# Altium PCB PCB1.2.PcbDoc (part 2 of 2)
Units mil, origin at the board's own origin, x right, y up, seen from the top; angles counter-clockwise.
Board outline 1692.91 x 1692.91 mil, 4 copper layers (Top Layer, Mid-Layer 1, Mid-Layer 2, Bottom Layer); 152 components, 107 nets, 552 pads, 236 vias.
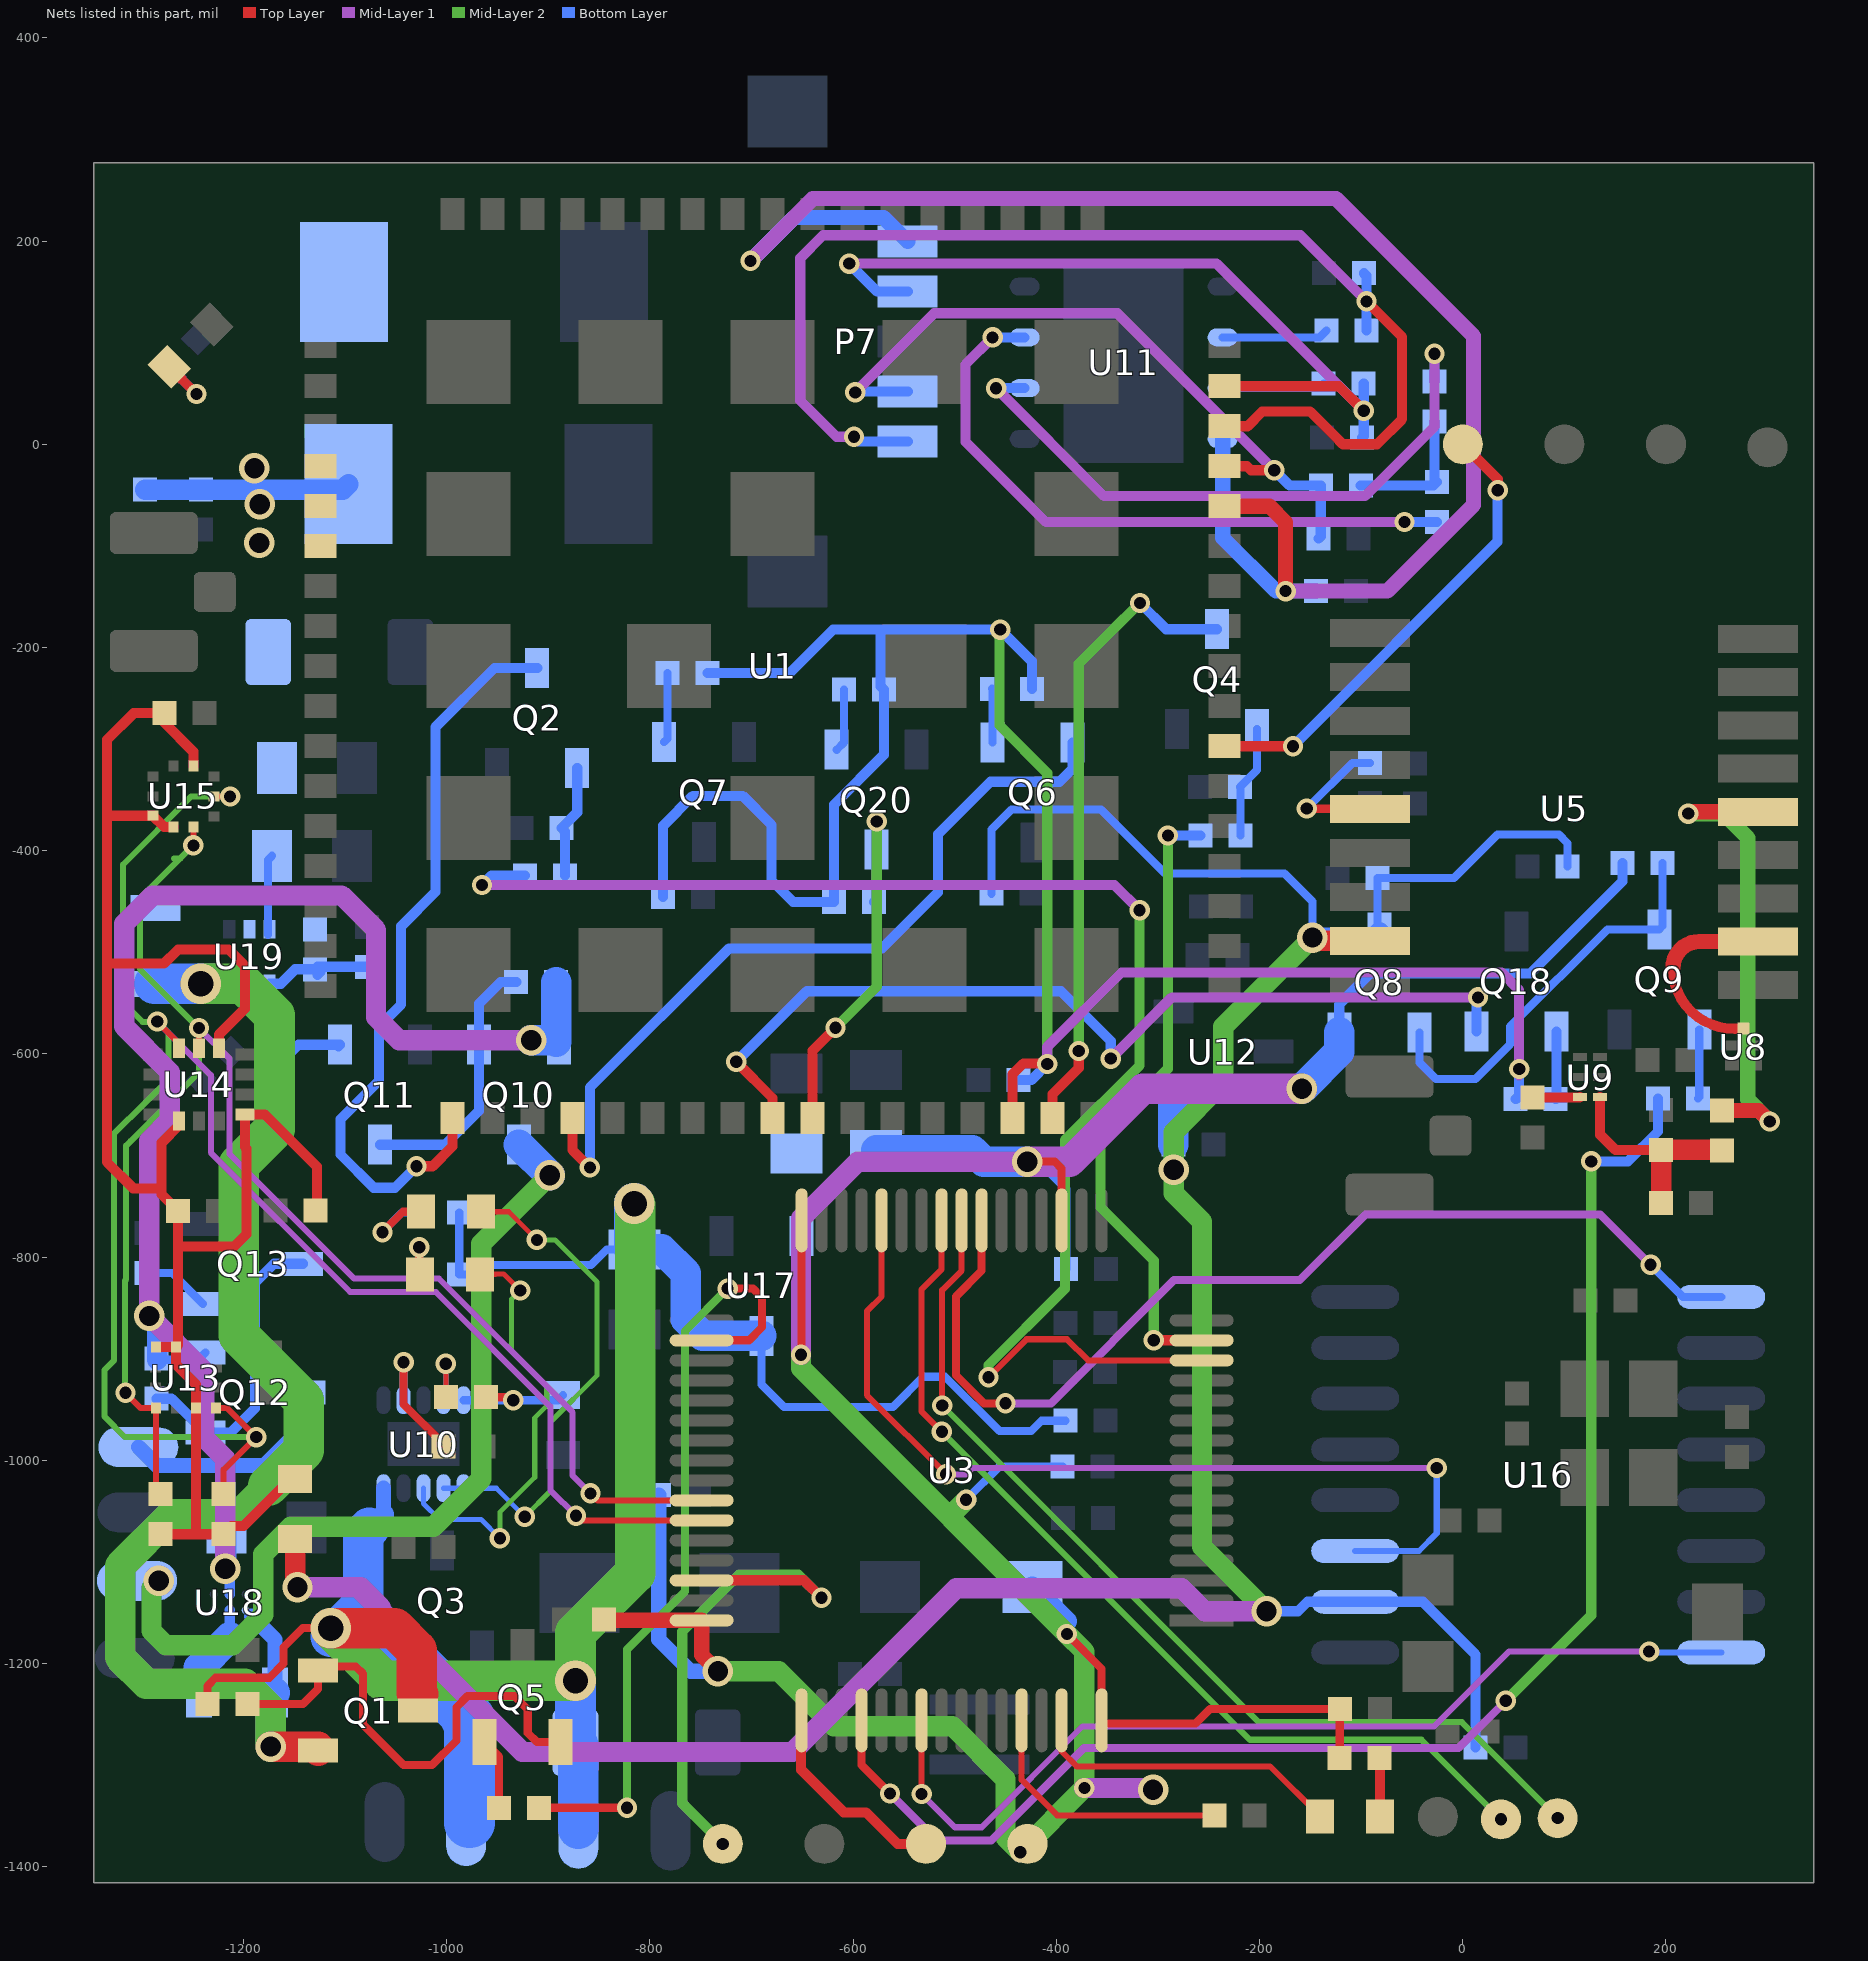
[diagram p4: the nets of this part, all layers, seen from the top]

## Via types
v1: diameter 20, hole 12, Top Layer to Bottom Layer, tented both sides, 204 vias
v2: diameter 30, hole 20, Top Layer to Bottom Layer, tented both sides, 25 vias
v3: diameter 40, hole 25, Top Layer to Bottom Layer, tented both sides, 7 vias

## Nets (pads, with @x,y where several pads share a name; then routed paths per layer and width w, separated by ;. In a path a pad name is that pad's centre, name@x,y a point inside that pad or via, vN(x,y) a via of type N, cw(c..) or ccw(c..) an arc to the next point about the centre after c; other vN are vias at no path point) (continued)
NetL2_1: L2.1 U5.14 | length 477.7
  Top Layer w15: v1(221.99,-363.51) 223.77,-361.74 U5.14@290.75,-361.74 ; L2.1@255.01,-655.65 291.37,-655.65 v1(302.22,-666.51)
  Mid-Layer 2 w15: v1(221.99,-363.51) 256.52,-363.51 280.57,-387.56 280.57,-644.85 v1(302.22,-666.51)
NetL3_1: L3.1 U9.3 | length 47.4
  Top Layer w10: L3.1@68.41,-643.04 114.94,-643.04 U9.3@115.52,-642.46
NetL5_2: L5.2 U18.B1 | length 93.6
  Bottom Layer w10: L5.2@-1243.95,-1228.55 L5.2@-1243.95,-1204.36 ; -1213.65,-1174.07 U18.B1@-1213.65,-1147.51
  Bottom Layer w30: L5.2@-1243.95,-1204.36 -1213.65,-1174.07
NetL6_1: L6.1 U19.5
NetLED1_2: LED1.2 R9.1 | length 75.7
  Top Layer w10: LED1.2@-1273.07,76.23 v1(-1246.31,49.48)
  Bottom Layer w10: R9.1@-1273.07,76.23 v1(-1246.31,49.48)
NetLED2_1: LED2.1 R29.2 | length 90.5
  Top Layer w8: v1(-1063.27,-775.47) -1043.15,-755.35 LED2.1@-1025.27,-755.35
  Bottom Layer w8: v1(-1063.27,-775.47) -1043.94,-756.15 R29.2@-1027.13,-756.15
NetLED2_2: LED2.2 U10.6 U10.7 | length 510.4
  Top Layer w5: LED2.2@-966.22,-755.35 -938.97,-755.35 ; -928.03,-766.29 -938.97,-755.35 ; v1(-911.3,-783.01) -938.97,-755.35
  Mid-Layer 2 w5: v1(-923.16,-1055.5) -897.96,-1030.31 -897.96,-962.35 -851.98,-916.36 -851.98,-824.5 -893.46,-783.01 v1(-911.3,-783.01)
  Bottom Layer w5: U10.7@-1003.11,-1027.46 U10.6@-983.42,-1027.46 -951.2,-1027.46 v1(-923.16,-1055.5)
NetLED4_1: LED4.1 R12.2 | length 54.1
  Top Layer w8: v1(-1027.13,-790.29) -1027.13,-816.17 LED4.1@-1026.16,-817.15
  Bottom Layer w8: R12.2@-1027.13,-817.15 v1(-1027.13,-790.29)
NetLED4_2: LED4.2 U10.8 | length 446.7
  Top Layer w5: -952.19,-817.15 LED4.2@-967.11,-817.15 -966.41,-816.45 -944.12,-816.45 v1(-927.64,-832.93)
  Mid-Layer 2 w5: v1(-947.74,-1076.74) -947.74,-1051.08 -913.39,-1016.72 -913.39,-958.21 -901.58,-946.4 -901.58,-927.14 -936.22,-892.51 -936.22,-841.51 v1(-927.64,-832.93)
  Bottom Layer w5: U10.8@-1022.79,-1027.46 -1022.79,-1042.67 -1007.37,-1058.09 -966.39,-1058.09 v1(-947.74,-1076.74)
NetLED5_1: LED5.1 R65.1 | length 57.6
  Top Layer w10: R65.1@-81.75,-1293.1 -81.42,-1293.43 LED5.1@-81.42,-1350.52
NetLED5_2: LED5.2 U3.62 | length 311.5
  Top Layer w6: U3.62@-394.8,-1255.91 -394.8,-1286.61 -380.14,-1301.27 -204.48,-1301.27 -189.72,-1301.27 LED5.2@-140.47,-1350.52
NetQ1_1: Q1.1 Q5.2 R8.2 | length 485.5
  Top Layer w8: R8.2@-1196.21,-1240.02 -1141.58,-1240.02 -1126.58,-1225.02 Q1.1@-1126.58,-1207.02 -1126.58,-1203.02 -1089.58,-1203.02 -1082.58,-1210.02 -1082.58,-1260.02 -1042.58,-1300.02 -1014.58,-1300.02 -990.58,-1276.02 -990.58,-1243.02 -979.58,-1232.02 -933.47,-1232.02 -920.26,-1245.24 -920.26,-1268.35 -911.29,-1277.31 Q5.2@-888.18,-1277.31
NetQ2_1: Q2.1 R10.1 R11.1 | length 113.5
  Bottom Layer w10: R10.1@-883.74,-424.24 -883.74,-381.01 R11.1@-887.09,-377.67 -871.62,-362.19 Q2.1@-871.62,-318.53
NetQ4_1: Q4.1 R4.1 R16.1 | length 111.7
  Bottom Layer w8: R16.1@-218.7,-384.95 -218.7,-337.74 R4.1@-219.17,-337.27 -202.4,-320.5 Q4.1@-202.4,-280.38
NetQ5_1: Q5.1 R17.1 | length 70.7
  Top Layer w8: Q5.1@-962.99,-1277.31 -948.58,-1291.71 R17.1@-948.58,-1342.02
NetQ6_1: Q6.1 R28.1 | length 53.1
  Bottom Layer w8: R28.1@-463.46,-240.63 -462.79,-241.3 Q6.1@-462.79,-293.42
NetQ7_1: Q7.1 R31.1 | length 69.5
  Bottom Layer w8: Q7.1@-786.19,-293.16 -782.85,-289.82 R31.1@-782.85,-225.07
NetQ8_1: Q8.1 Q9.3 R33.2 | length 405.9
  Bottom Layer w8: Q8.1@-42.76,-578.76 -42.76,-608.27 -26.22,-624.81 12.37,-624.81 46.52,-590.65 46.52,-573.13 142.28,-477.38 Q9.3@193.4,-477.38 ; Q9.3@196.61,-474.17 R33.2@196.61,-412.12
NetQ9_1: Q9.1 R34.1 | length 68.5
  Bottom Layer w8: R34.1@231.51,-643.8 232.77,-642.54 Q9.1@232.77,-575.8
NetQ10_1: Q10.1 Q11.3 R36.2 | length 262.2
  Bottom Layer w10: Q11.3@-1065.84,-689.38 -1001.73,-689.38 -968.32,-655.97 Q10.1@-968.32,-590.95 -968.32,-550.57 -947.13,-529.38 R36.2@-931.67,-529.38
NetQ11_1: Q11.1 R37.1 | length 95.6
  Bottom Layer w10: R37.1@-1165.03,-633.64 -1165.03,-610.03 -1145.95,-590.95 Q11.1@-1108.22,-590.95 ; Q11.1@-1108.22,-590.95 Q11.1@-1105.21,-590.95 -1106.72,-592.46 Q11.1@-1108.22,-590.95
NetQ12_1: Q12.1 Q13.3 R50.2 | length 299.2
  Bottom Layer w10: R50.2@-1285.84,-939.37 -1270.8,-939.37 Q12.1@-1237.57,-972.6 -1212.68,-972.6 -1188.8,-948.72 -1188.8,-825.39 -1170.01,-806.6 Q13.3@-1141.46,-806.6
NetQ13_1: Q13.1 R51.1 | length 68.4
  Bottom Layer w8: R51.1@-1295.73,-815.68 -1270.18,-815.68 Q13.1@-1239.89,-845.97
NetQ18_1: Q18.1 R40.1 | length 66.9
  Bottom Layer w10: R40.1@91.51,-644.49 92.15,-643.85 Q18.1@92.15,-577.82
NetQ20_1: Q20.1 R44.1 | length 62.2
  Bottom Layer w8: Q20.1@-616.15,-300.63 -609.11,-293.58 R44.1@-609.11,-241.36
NetR3_1: R3.1 U3.60 | length 263.1
  Top Layer w6: U3.60@-434.17,-1255.91 -434.17,-1314.49 -399.22,-1349.45 R3.1@-244.15,-1349.45
NetR13_1: R13.1 U10.2 | length 136.4
  Top Layer w8: v1(-1042.48,-903.56) -1042.48,-944.78 -1003.17,-984.09 R13.1@-1003.17,-986.41
  Bottom Layer w8: U10.2@-1042.48,-940.85 v1(-1042.48,-903.56)
NetR14_1: R14.1 R15.2 U10.5 | length 128.2
  Top Layer w8: R14.1@-961.55,-937.9 -937.48,-937.9 v1(-934.53,-940.85)
  Bottom Layer w8: U10.5@-983.42,-940.85 v1(-934.53,-940.85) -890.38,-940.85 R15.2@-885.49,-935.95
NetR14_2: R14.2 U10.4 | length 69.8
  Top Layer w5: R14.2@-1000.92,-937.9 v1(-1000.92,-904.92)
  Bottom Layer w5: U10.4@-1003.11,-940.85 -1000.92,-938.65 v1(-1000.92,-904.92)
NetR18_1: R18.1 U5.5 | length 143.6
  Top Layer w8: v1(-153.58,-358.42) -153.26,-358.74 U5.5@-91.14,-358.74
  Bottom Layer w8: v1(-153.58,-358.42) -108.67,-313.51 R18.1@-91.14,-313.51
NetR19_2: R19.2 R20.2 U19.1 | length 106.4
  Bottom Layer w10: U19.1@-1174.32,-530.9 -1163.46,-530.9 -1149.25,-516.69 R19.2@-1129.48,-516.69 -1127,-514.22 R20.2@-1078.73,-514.22 ; R19.2@-1127.33,-522.06 R19.2@-1124.57,-519.31
NetR23_2: R23.2 U11.7 | length 101.3
  Bottom Layer w8: U11.7@-236.31,55.27 -141.28,55.27 R23.2@-136.86,59.69
NetR25_1: R25.1 U11.3 | length 641.9
  Mid-Layer 1 w10: v1(-462.76,105.27) -489.37,78.65 -489.37,2.54 -410.31,-76.52 -366.38,-76.52 v1(-57.26,-76.52)
  Bottom Layer w10: v1(-462.76,105.27) U11.3@-431.2,105.27 ; v1(-57.26,-76.52) R25.1@-25.52,-76.52
NetR25_2: R25.2 R26.2 R27.2 | length 136.8
  Bottom Layer w10: R27.2@-100.35,-40.44 -28.81,-40.44 R25.2@-25.52,-37.15 -27.89,-34.79 R26.2@-27.89,22.49
NetR26_1: R26.1 U11.2 | length 630.7
  Mid-Layer 1 w10: v1(-459.31,55.27) -353.24,-50.8 -96.12,-50.8 -27.89,17.43 v1(-27.89,89.15)
  Bottom Layer w10: v1(-459.31,55.27) U11.2@-431.2,55.27 ; R26.1@-27.89,61.86 v1(-27.89,89.15)
NetR39_2: R39.2 U11.6 | length 105.1
  Bottom Layer w8: U11.6@-236.31,105.27 -141.06,105.27 R39.2@-134.13,112.2
POWER_CTRL_GPS: R34.2 U3.52 | length 1459.8
  Top Layer w8: U3.52@-591.65,-1255.91 -591.65,-1299.99 v1(-563.79,-1327.86)
  Mid-Layer 1 w8: v1(-563.79,-1327.86) -525.72,-1365.93 ; -538.24,-1353.41 -525.72,-1365.93 ; v1(42.29,-1236.73) -4.12,-1283.14 -372.87,-1283.14 -464.1,-1374.38 -517.27,-1374.38 -525.72,-1365.93
  Mid-Layer 2 w10: v1(42.29,-1236.73) 126.42,-1152.61 v1(126.42,-705.79)
  Bottom Layer w10: v1(126.42,-705.79) 162.72,-705.79 192.14,-676.38 R34.2@192.14,-643.8
POWER_VBAT: R17.2 U3.34 | length 770.2
  Top Layer w8: R17.2@-909.21,-1342.02 v1(-822.58,-1342.02) ; U3.34@-749.13,-881.89 -702.45,-881.89 -689.58,-869.02 -689.58,-840.02 -698.58,-831.02 v1(-723.58,-831.02)
  Mid-Layer 2 w8: v1(-822.58,-1342.02) -822.58,-1186.02 -765.58,-1129.02 -765.58,-873.02 v1(-723.58,-831.02)
PWRKEY: Q2.3 U1.1 | length 752
  Top Layer w10: v1(-1029.81,-710.55) -1013.89,-710.55 -994.31,-690.97 U1.1@-994.31,-663.27
  Bottom Layer w10: v1(-1029.81,-710.55) -1050.91,-731.65 -1071.93,-731.65 -1104.58,-699 -1104.58,-664.17 -1066.56,-626.14 -1066.56,-573.02 -1044.93,-551.4 -1044.93,-474.29 -1011.21,-440.57 -1011.21,-278.33 -952.99,-220.11 Q2.3@-910.99,-220.11
RESET: Q4.3 U1.16 | length 644.8
  Top Layer w10: U1.16@-403.76,-663.27 -403.76,-639.77 -377.91,-613.92 v1(-377.91,-597.11)
  Mid-Layer 2 w10: v1(-377.91,-597.11) -377.91,-216.05 -346.79,-184.94 ; -335.98,-174.13 -346.79,-184.94 ; v1(-317.72,-156.2) -318.05,-156.2 -346.79,-184.94
  Bottom Layer w10: v1(-317.72,-156.2) -291.96,-181.95 Q4.3@-241.77,-181.95
RF_IN: U5.11 U8.1 | length 202.3
  Top Layer w10: 206.82,-515.39 ccw(c266.63,-515.39) U8.1@276.19,-574.43
  Top Layer w15: 206.82,-515.39 cw(c232.81,-515.39) 232.81,-489.41 U5.11@290.75,-489.41
RI: Q6.2 U1.4 | length 798.6
  Top Layer w10: U1.4@-876.2,-663.27 -876.2,-694.68 v1(-859.13,-711.75)
  Bottom Layer w10: v1(-859.13,-711.75) -859.13,-633.13 -722.08,-496.08 -571.63,-496.08 -516.43,-440.89 -516.43,-383.7 -464.82,-332.08 -396.89,-332.08 -384.05,-319.24 Q6.2@-384.05,-293.42
RXD3: T18.1 U3.25 | length 933
  Top Layer w6: U3.25@-512.91,-763.78 -512.91,-811.96 -532.86,-831.9 -532.86,-951.78 v1(-512.68,-971.96)
  Mid-Layer 2 w6: v1(-512.68,-971.96) -253.79,-1230.84 -209.56,-1275.07 -40.66,-1275.07 v1(37.57,-1353.31)
SCL: R22.2 U3.42 U13.1 U14.13 U15.2 | length 1560.6
  Top Layer w6: v1(-1316.28,-933.55) -1301.16,-948.67 U13.1@-1286.08,-948.67 -1286.08,-1028.87 R22.2@-1281.6,-1033.35 ; v1(-1249.37,-394.73) U15.2@-1249.37,-376.61 ; U14.13@-1243.94,-594.42 v1(-1243.94,-574.54) ; v1(-858.6,-1032.54) -851.77,-1039.37 U3.42@-749.13,-1039.37
  Mid-Layer 1 w6: v1(-1243.94,-574.54) -1213.67,-604.81 -1213.67,-698.6 -1091.03,-821.24 -1007.65,-821.24 -876.11,-952.78 -876.11,-1015.03 v1(-858.6,-1032.54)
  Mid-Layer 2 w6: v1(-1316.28,-933.55) -1316.58,-933.24 -1316.58,-823.06 -1315.58,-822.06 -1315.58,-690.21 -1311.2,-685.83 -1243.94,-618.57 v1(-1243.94,-574.54) -1301.99,-516.48 -1301.99,-447.35 -1262.22,-407.58 ; -1268.18,-407.58 -1262.22,-407.58 ; v1(-1249.37,-394.73) -1262.22,-407.58
SCLK: U3.55 U16.16 | length 945.2
  Top Layer w6: v1(-532.6,-1328.46) U3.55@-532.6,-1255.91
  Mid-Layer 1 w6: v1(-532.6,-1328.46) -499.94,-1361.12 -473.46,-1361.12 -374.26,-1261.93 -28.11,-1261.93 45.71,-1188.1 v1(183.4,-1188.1)
  Bottom Layer w6: v1(183.4,-1188.1) 184.55,-1189.25 U16.16@254.42,-1189.25
SDA: R24.1 U3.43 U13.4 U14.14 U15.4 | length 1891.7
  Top Layer w6: v1(-1284.99,-568.13) -1263.62,-589.49 U14.14@-1263.62,-594.42 ; U15.4@-1229.19,-346.59 v1(-1213.21,-346.59) ; U13.4@-1227.03,-948.67 -1216.02,-948.67 v1(-1187.52,-977.17) -1219.6,-1009.25 R24.1@-1219.6,-1033.35 ; v1(-872.74,-1054.53) -868.22,-1059.06 U3.43@-749.13,-1059.06
  Mid-Layer 1 w6: v1(-1284.99,-568.13) -1232.12,-621 -1232.12,-697.21 -1094.97,-834.35 -1010.68,-834.35 -897.94,-947.1 -897.94,-1029.34 v1(-872.74,-1054.53)
  Mid-Layer 2 w6: v1@-1284.99,-568.6 -1299.21,-568.6 -1318.67,-549.14 -1318.67,-413.74 -1251.52,-346.59 v1(-1213.21,-346.59) ; v1(-1284.99,-568.13) -1273.68,-579.44 -1273.68,-624.87 -1296.98,-648.17 -1327.58,-678.77 -1327.58,-901.78 -1336.82,-911.02 -1336.82,-957.02 -1316.67,-977.17 v1(-1187.52,-977.17)
SIM_CLK: C17.2 P7.1 R39.1 U1.32 | length 1248.3
  Top Layer w10: U1.32@-234.46,17.83 -211.72,17.83 -197.28,32.27 -150.19,32.27 -126.27,8.36 -118.03,0.12 -84.35,0.12 -59.65,24.81 -59.65,105.55 v1(-94.76,140.66)
  Mid-Layer 1 w10: v1(-599.25,7.46) -616.42,7.46 -652.15,43.19 -652.15,183.24 -629.66,205.73 -159.83,205.73 v1(-94.76,140.66)
  Bottom Layer w10: v1(-599.25,7.46) -594.45,2.66 P7.1@-546.3,2.66 ; C17.2@-97.29,168.4 -94.76,165.88 v1(-94.76,140.66) R39.1@-94.76,112.2
SIM_DATA: C18.2 P7.2 R27.1 U1.31 | length 716.5
  Top Layer w10: U1.31@-234.46,-21.54 -212.32,-21.54 -208.37,-25.49 v1(-185.57,-25.49)
  Mid-Layer 1 w10: v1(-597.95,51.12) -520.12,128.95 -340.01,128.95 v1(-185.57,-25.49)
  Bottom Layer w10: v1(-597.95,51.12) -597.2,51.87 P7.2@-546.3,51.87 ; v1(-185.57,-25.49) -170.62,-40.44 R27.1@-139.72,-40.44 -139.72,-90.6 C18.2@-141.98,-92.86
SIM_PWR: R10.2 U3.14 | length 1459.8
  Top Layer w6: v1(-466.75,-918.29) -429.26,-880.81 -389.56,-880.81 -368.79,-901.58 U3.14@-259.4,-901.58 ; U3.14@-259.4,-903.97 U3.14@-257.01,-901.58
  Mid-Layer 1 w10: v1(-965.28,-433.78) -342.91,-433.78 v1(-318.03,-458.67)
  Mid-Layer 2 w10: v1(-466.75,-918.29) -466.75,-906.26 -394.54,-834.06 -391.58,-831.1 -391.58,-685.02 -318.03,-611.46 v1(-318.03,-458.67)
  Bottom Layer w10: v1(-965.28,-433.78) -955.74,-424.24 R10.2@-923.11,-424.24
SIM_RST: C16.2 P7.4 R23.1 U1.33 | length 836.2
  Top Layer w10: U1.33@-234.46,57.2 -121.74,57.2 v1(-97.49,32.95)
  Mid-Layer 1 w10: v1(-603.85,177.87) -242.41,177.87 -241.22,176.68 v1(-97.49,32.95)
  Bottom Layer w10: v1(-603.85,177.87) -576.27,150.3 P7.4@-546.3,150.3 ; C16.2@-98.98,6.52 -97.49,8.02 v1(-97.49,32.95) R23.1@-97.49,59.69
SIM_RST1: R16.2 U3.15 | length 625.5
  Top Layer w10: v1(-304.21,-881.89) U3.15@-257.01,-881.89
  Mid-Layer 2 w10: v1(-304.21,-881.89) -304.21,-803.27 -356.58,-750.9 -356.58,-681.02 -290.25,-614.68 v1(-290.25,-384.95)
  Bottom Layer w10: v1(-290.25,-384.95) R16.2@-258.07,-384.95
SIM_RXD: Q20.3 R46.1 U1.10 | length 398.5
  Top Layer w10: U1.10@-639.98,-663.27 -639.98,-596.77 v1(-617.43,-574.23)
  Mid-Layer 2 w10: v1(-617.43,-574.23) -576.78,-533.57 v1(-576.78,-371.23)
  Bottom Layer w10: R46.1@-579.54,-450.37 -576.78,-447.61 Q20.3@-576.78,-399.05 v1(-576.78,-371.23)
SIM_TXD: Q18.2 U1.9 | length 923.5
  Top Layer w10: v1(-715.01,-607.77) -679.35,-643.43 U1.9@-679.35,-663.27
  Mid-Layer 1 w10: v1(-346.51,-604.63) -286.26,-544.38 v1(15.07,-544.38)
  Bottom Layer w10: v1(-715.01,-607.77) -645.55,-538.31 -395.45,-538.31 -346.51,-587.25 v1(-346.51,-604.63) ; Q18.2@13.41,-577.82 v1@13.41,-546.04
SIM_VDD: C14.2 P7.5 U1.30 U11.8 | length 1707.2
  Top Layer w15: U1.30@-234.46,-60.91 -190.18,-60.91 -174.35,-76.75 v1(-174.35,-144.51)
  Mid-Layer 1 w15: v1(-701.06,180.53) -639.72,241.87 -124.66,241.87 10.61,106.6 10.61,-59.65 -74.24,-144.51 v1(-174.35,-144.51)
  Bottom Layer w15: v1(-701.06,180.53) -658.27,223.33 -570.12,223.33 P7.5@-546.3,199.51 ; U11.8@-236.31,5.27 -236.31,-91.95 -183.76,-144.5 C14.2@-144.35,-144.5
SPI_RESET: U3.28 U16.3 | length 925.4
  Top Layer w6: U3.28@-571.97,-763.78 -571.97,-838.78 -586.42,-853.23 -586.42,-935.91 v1(-508.55,-1013.77)
  Mid-Layer 1 w6: v1(-508.55,-1013.77) -488.7,-1013.77 -482.5,-1007.57 v1(-25.58,-1007.57)
  Bottom Layer w6: U16.3@-105.82,-1089.25 -43.07,-1089.25 -25.58,-1071.77 v1(-25.58,-1007.57)
SWCLK: T10.1 U3.49 | length 202
  Top Layer w10: U3.49@-650.71,-1255.91 -651.21,-1256.41 -651.21,-1304.69 -609.35,-1346.55 -587.35,-1346.55 -556.35,-1377.55 T10.1@-528.35,-1377.55
SWD: T9.1 U3.46 | length 520.2
  Top Layer w10: U3.46@-749.13,-1118.11 -648.47,-1118.11 v1(-631.24,-1135.35)
  Mid-Layer 2 w10: v1(-728.35,-1377.55) -768.24,-1337.66 -768.24,-1196.75 -768.24,-1168.48 -712.35,-1112.6 -674.04,-1112.6 -653.99,-1112.6 v1(-631.24,-1135.35)
TXD3: T11.1 U3.24 | length 964.3
  Top Layer w6: v1(-512.4,-946.07) -512.4,-832.43 -493.23,-813.26 U3.24@-493.23,-763.78
  Mid-Layer 2 w6: v1(-512.4,-946.07) -200.74,-1257.73 -3.48,-1257.73 -0.99,-1257.73 v1(93.44,-1352.16)
VBAT: C44.1 D4.2 Q1.3 R2.1 R8.1 R12.1 R29.1 T17.1 U10.10 U17.3 | length 2259.6
  Top Layer w8: R8.1@-1235.58,-1240.02 -1235.58,-1222.02 -1227.58,-1214.02 -1174.58,-1214.02 -1160.58,-1200.02 -1160.58,-1184.02 -1141.7,-1165.13 v3(-1114.24,-1165.13)
  Top Layer w40: v3(-1114.24,-1165.13) -1051.47,-1165.13 -1029.58,-1187.02 -1029.58,-1228.75 -1028.16,-1230.17
  Mid-Layer 2 w40: v3(-1114.24,-1165.13) -1062.37,-1217.01 v3(-873.28,-1217.01) -873.28,-1169.82 -814.5,-1111.04 v3@-814.5,-748.3
  Bottom Layer w8: R29.1@-987.76,-756.15 R12.1@-987.76,-817.15 -968.45,-817.15 -959.05,-807.74 -857.9,-807.74 -842.5,-792.34 C44.1@-815.28,-792.34 ; U17.3@-690.21,-877.45 -690.21,-925.39 -668.23,-947.38 -560.86,-947.38 -531.19,-917.71 -509.53,-917.71 -456.14,-971.1 -424.69,-971.1 -414.65,-961.06 R2.1@-390.95,-961.06
  Bottom Layer w15: -1062.16,-1053.2 U10.10@-1062.16,-1027.46
  Bottom Layer w20: -1082.26,-1073.29 -1062.16,-1053.2
  Bottom Layer w30: C44.1@-815.28,-792.34 -788.26,-792.34 -764.58,-816.02 -764.58,-861.02 -748.16,-877.45 U17.3@-690.21,-877.45
  Bottom Layer w40: v3@-1114.24,-1173.65 -1082.26,-1141.67 -1082.26,-1073.29 -1082.26,-1072.68 -1076.13,-1066.56 ; v3(-873.28,-1217.01) D4.2@-873.28,-1277.71 -870.44,-1280.56 T17.1@-870.44,-1362.68 ; v3(-815.51,-747.3) -815.51,-792.12 C44.1@-815.28,-792.34
VBAT2: L5.1 L6.2 Q1.2 U18.A1 U19.3 | length 1329.8
  Top Layer w30: v2(-1173.32,-1281.76) Q1.2@-1130.58,-1281.76 ; Q1.2@-1126.58,-1285.76 Q1.2@-1130.58,-1281.76 ; Q1.2@-1126.58,-1281.76 Q1.2@-1130.58,-1281.76
  Mid-Layer 2 w30: -1175.58,-1025.02 -1203.58,-1053.02 -1270.58,-1053.02 -1321.58,-1104.02 -1321.58,-1194.02 -1295.58,-1220.02 -1198.58,-1220.02 -1173.32,-1245.28 v2(-1173.32,-1281.76)
  Mid-Layer 2 w40: v3(-1242.17,-530.77) -1200.83,-530.77 -1169.58,-562.02 -1169.58,-674.02 -1204.58,-709.02 -1204.58,-877.02 -1140.58,-941.02 -1140.58,-990.02 -1175.58,-1025.02
  Bottom Layer w15: -1191.94,-1153.47 -1169.15,-1176.26 L5.1@-1169.15,-1228.55
  Bottom Layer w30: v2(-1173.32,-1281.76) -1173.32,-1232.73 L5.1@-1169.15,-1228.55
  Bottom Layer w40: L6.2@-1287.63,-530.9 -1286.8,-530.9 v3@-1228.42,-530.9
VBAT_OUT: C24.2 C29.1 C31.1 C43.2 C47.1 C48.1 D3.2 R19.1 U1.55 U1.56 U1.57 U19.6 | length 281.9
  Bottom Layer w8: U19.6@-1175.88,-482.69 -1175.88,-408.97 C47.1@-1171.93,-405.02
  Bottom Layer w20: C43.2@-1297.06,-44.66 C24.2@-1242.06,-44.66 -1102.26,-44.66 C29.1@-1096.76,-39.16
  other v2: -1184.68,-97.07 -1184.12,-58.98 -1189.24,-23.63
VBUS: T1.1 U1.24 | length 461.6
  Top Layer w10: U1.24@-234.46,-297.13 v1(-167.07,-297.13) ; T1.1@0,0 34.44,-34.44 v1(34.44,-45.29)
  Bottom Layer w10: v1(-167.07,-297.13) 34.08,-95.98 v1@34.08,-45.82
VCC_3.3V_S: C11.2 C32.2 C37.1 FB2.1 Q8.3 R30.2 R42.2 U5.8 U12.1 U16.2 | length 3177.8
  Top Layer w20: v2@-1149.27,-1125.02 FB2.1@-1149.27,-1077.67 ; v2@-144.72,-488.66 U5.8@-91.14,-488.66
  Mid-Layer 1 w20: v2(-1146.92,-1125.02) -1087.58,-1125.02 ; v2(-193.08,-1148.52) -254.08,-1148.52 -276.58,-1126.02 -498.58,-1126.02 -659.58,-1287.02 -925.58,-1287.02 -1064.82,-1147.79 ; -1087.58,-1125.02 -1064.82,-1147.79 ; -1087.58,-1125.02 -1084.66,-1125.02 -1064.82,-1144.86 -1064.82,-1147.79
  Mid-Layer 2 w20: v2(-193.08,-1148.52) -256.58,-1085.02 -256.58,-765.02 -284.58,-737.02 v2(-284.58,-714.02) -284.58,-677.02 -235.58,-628.02 -235.58,-573.16 v2(-147.9,-485.48)
  Bottom Layer w8: R30.2@-463.88,-442.32 -463.88,-379.08 -444.08,-359.28 -356.05,-359.28 -292.97,-422.36 -175.49,-422.36 -147.9,-449.95 v2(-147.9,-485.48) ; Q8.3@-82.13,-480.34 -83.98,-478.48 C32.2@-83.98,-426.85 -8.54,-426.85 34.16,-384.14 94.71,-384.14 103.24,-392.67 R42.2@103.24,-415.57
  Bottom Layer w10: v2(-193.08,-1148.52) -162.08,-1148.52 -152.81,-1139.25 U16.2@-105.82,-1139.25 -39.35,-1139.25 12.41,-1191.02 C11.2@12.41,-1282.7
  Bottom Layer w20: v2(-147.9,-485.48) -87.26,-485.48 Q8.3@-82.13,-480.34
  Bottom Layer w30: C37.1@-284.73,-689.17 U12.1@-284.73,-637.17
VCC_3V: C12.2 C13.2 C15.2 C28.1 C34.1 C50.2 D1.1 Q8.2 R6.1 R33.1 R65.2 T19.1 U3.19 U3.32 U3.48 U3.64 U17.2 | length 3664.8
  Top Layer w8: v1@-650.71,-895.47 U3.32@-650.71,-763.78 ; v2(-428.58,-706.02) -401.58,-706.02 -394.8,-712.8 U3.19@-394.8,-763.78 ; v1(-389.63,-1170.95) -355.43,-1205.15 U3.64@-355.43,-1255.91 ; U3.64@-353.88,-1257.46 -355.43,-1259.01 -263.01,-1259.01 -248.83,-1244.83 C12.2@-121.05,-1244.83 R65.2@-121.12,-1293.1 R65.2@-121.12,-1293.1
  Top Layer w15: C13.2@-845.22,-1157.48 U3.48@-749.13,-1157.48 -749.13,-1191.54 v2(-733.06,-1207.62)
  Mid-Layer 1 w20: v1(-651.31,-896.07) -651.31,-761.75 -595.58,-706.02 v2(-428.58,-706.02) ; v1(-372.42,-1322.51) v2@-304.86,-1322.51
  Mid-Layer 1 w30: v2(-428.58,-706.02) -386.58,-706.02 -315,-634.44 v2(-158.29,-634.44)
  Mid-Layer 2 w20: v2(-733.06,-1207.62) -673.22,-1207.61 -619.18,-1261.66 -502.16,-1261.66 -450.1,-1313.71 -450.1,-1371.23 v1(-435.62,-1385.71) v1(-372.42,-1322.51) -372.42,-1188.16 v1(-389.63,-1170.95) -618.56,-942.02 -651.31,-909.27 v1(-651.31,-896.07) ; -497.7,-1047.68 v1(-488.79,-1038.77)
  Bottom Layer w8: v1(-488.79,-1038.77) -456.06,-1006.04 R6.1@-393.74,-1006.04 ; v2@-422.93,-700.37 -390.33,-732.97 C15.2@-390.33,-811.75
  Bottom Layer w10: Q8.2@-121.5,-578.76 -121.5,-551.27 -90.97,-520.75 66.71,-520.75 157.24,-430.21 R33.1@157.24,-412.12
  Bottom Layer w15: C50.2@-791.32,-1034.23 -791.32,-1176.37 -760.08,-1207.61 v2(-733.06,-1207.62)
  Bottom Layer w20: D1.1@-423.66,-1136.92 D1.1@-423.66,-1124.52 -389.63,-1158.55
  Bottom Layer w30: C28.1@-577.46,-694.71 -482.58,-694.71 -471.27,-706.02 v2(-428.58,-706.02) ; v2(-158.29,-634.44) -121.5,-597.65 Q8.2@-121.5,-578.76
  other v2: -304.86,-1324.32
VCC_3V_SENSOR: C35.2 C38.2 C41.2 FB2.2 R22.1 R24.2 U13.3 U13.9 U13.10 U14.5 U14.8 U14.12 U15.1 U15.6 U15.10 | length 1869.4
  Top Layer w10: U13.10@-1286.08,-888.63 U13.9@-1266.4,-888.63 ; R22.1@-1281.6,-1072.72 -1246.15,-1072.72 ; U15.1@-1269.05,-376.61 -1278.21,-376.61 U15.10@-1289.23,-365.59 -1333.66,-365.59 -1334.37,-364.88 ; C41.2@-1264.97,-754.13 -1280.67,-738.43 -1280.67,-732.35 ; -1264.39,-767.86 -1264.39,-789.71 ; U14.5@-1263.62,-666.07 -1263.62,-670.43 -1280.67,-687.48 -1280.67,-732.35 ; U15.6@-1249.37,-316.57 -1249.37,-302.47 -1277.58,-274.26 C35.2@-1277.58,-264.59 -1308.21,-264.59 -1334.37,-290.75 -1334.37,-364.88 ; U14.12@-1224.25,-594.42 -1224.25,-581.06 -1198.71,-555.52 -1198.71,-513.15 -1214.71,-497.16 -1264.43,-497.16 -1278.4,-511.13 -1332.98,-511.13 -1334.37,-512.52 ; R24.2@-1215.67,-1072.72 R24.2@-1219.6,-1072.72 ; R24.2@-1215.67,-1068.78 R24.2@-1219.6,-1072.72 ; FB2.2@-1149.27,-1018.61 -1154.02,-1018.61 -1200.16,-1064.75 -1211.64,-1064.75 R24.2@-1219.6,-1072.72 ; C38.2@-1129.33,-754.17 -1127.77,-752.61 -1127.77,-710.92 ; -1127.77,-731.79 -1127.77,-710.92 ; -1334.37,-512.52 -1334.37,-706.54 -1308.56,-732.35 -1280.67,-732.35 ; -1334.37,-512.52 -1334.37,-364.88 ; U13.9@-1266.4,-888.63 -1264.39,-886.62 -1264.39,-789.71 ; U13.9@-1266.4,-888.63 -1266.4,-905.97 -1246.71,-925.65 U13.3@-1246.71,-948.67 -1246.71,-1072.15 -1246.15,-1072.72 ; -1264.39,-789.71 -1234.6,-789.71 -1234.49,-789.6 -1209.08,-789.6 -1197.07,-777.59 -1197.07,-693.09 -1198.66,-691.49 U14.8@-1198.66,-659.77 -1178.92,-659.77 -1127.77,-710.92 ; -1246.15,-1072.72 R24.2@-1219.6,-1072.72
VCC_5V: C46.1 Q10.2 Q12.2 R36.1 R50.1 U18.B2 | length 1460.1
  Mid-Layer 1 w20: v2(-1218.17,-1106.87) -1218.17,-998.43 -1238.58,-978.02 -1238.58,-912.14 v2(-1292.82,-857.9) -1292.82,-685.26 -1272.58,-665.02 -1272.58,-618.02 -1317.58,-573.02 -1317.58,-472.02 -1289.58,-444.02 -1103.58,-444.02 -1069.58,-478.02 -1069.58,-564.02 -1046.99,-586.61 v2(-916.84,-586.61)
  Bottom Layer w8: R50.1@-1284.79,-900 R50.1@-1285.84,-900 ; R50.1@-1279.71,-893.86 -1284.79,-898.94 R50.1@-1285.84,-900 ; Q12.2@-1237.57,-893.86 -1244.76,-901.05 -1284.79,-901.05 R50.1@-1285.84,-900
  Bottom Layer w10: U18.B2@-1213.65,-1131.76 v2@-1213.65,-1106.87
  Bottom Layer w20: R50.1@-1284.79,-901.05 -1284.79,-900 -1284.79,-898.94 v2@-1284.79,-865.92 ; C46.1@-1216.98,-1065.97 -1216.98,-1103.55 v2@-1213.65,-1106.87
  Bottom Layer w30: v2(-916.84,-586.61) Q10.2@-893.92,-586.61 ; Q10.2@-892.3,-588.24 R36.1@-892.3,-529.38
VCC_5V1: Q10.3 T4.1 | length 854.9
  Mid-Layer 2 w20: v2(-1283.53,-1118.42) -1290.58,-1125.48 -1290.58,-1168.02 -1276.58,-1182.02 -1210.58,-1182.02 -1180.58,-1152.02 -1180.58,-1092.38 -1153.58,-1065.38 -1013.05,-1065.38 -966.06,-1018.4 -966.06,-786.85 -938.76,-759.55 v2(-898.77,-719.56)
  Bottom Layer w30: Q10.3@-928.95,-689.38 v2(-898.77,-719.56)
VCC_5V2: Q12.3 T5.1 | length 220.2
  Bottom Layer w15: T5.1@-1303.53,-987 -1285.46,-1005.06 -1219.2,-1005.06 -1210.98,-1005.06 -1179.25,-1005.06 -1139.15,-964.96 Q12.3@-1139.15,-933.23
VCC_IN: Q3.2 T15.1 | length 200.4
  Bottom Layer w50: Q3.2@-1044.16,-1187.29 -980.96,-1250.49 ; -980.96,-1253.92 -980.96,-1250.49 ; T15.1@-977.53,-1356.64 -977.53,-1253.92 -980.96,-1250.49
VCC_RF: C23.2 C25.2 L2.2 U9.4 | length 215.7
  Top Layer w10: U9.4@135.21,-642.46 135.21,-679.5 150.17,-694.47 C25.2@195.21,-694.47
  Top Layer w20: C23.2@195.01,-746.83 195.21,-746.63 C25.2@195.21,-694.47 254.45,-694.47 L2.2@255.01,-695.02
VDD_EXT: C33.2 R28.2 R31.2 R32.2 R40.2 R44.2 R46.2 U1.15 | length 2189.7
  Top Layer w10: U1.15@-443.13,-663.27 -443.13,-620.01 -432.5,-609.39 -409.45,-609.39 v1(-408.92,-609.91)
  Mid-Layer 1 w10: v1(-408.92,-609.91) -408.92,-593.04 -335.81,-519.94 38.23,-519.94 55.52,-537.23 v1(55.52,-614.9) v1@55.52,-620.97
  Mid-Layer 2 w10: v1@-455.91,-183.65 -455.91,-276.64 -408.92,-323.63 v1(-408.92,-609.91)
  Bottom Layer w10: R32.2@-787.03,-445.55 -787.03,-375.29 -757.8,-346.06 -708.8,-346.06 -680.29,-374.57 -680.29,-429.3 -659.22,-450.37 R46.2@-618.91,-450.37 -618.91,-354.72 -569.74,-305.55 R44.2@-569.74,-241.36 -572.99,-238.11 -572.99,-182.39 ; R31.2@-743.48,-225.07 -662.53,-225.07 -619.85,-182.39 -572.99,-182.39 ; C33.2@-437.48,-625.78 -424.79,-625.78 v1(-408.92,-609.91) v1@-408.39,-609.39 ; R28.2@-424.09,-240.63 -424.09,-213.52 v1(-455.22,-182.39) -572.99,-182.39 ; R40.2@52.14,-644.49 55.52,-641.12 v1(55.52,-614.9)
WP: U3.23 U16.9 | length 1038.3
  Top Layer w8: U3.23@-473.54,-763.78 -473.54,-813.44 -498.73,-838.62 -498.73,-916.31 -471.14,-943.9 v1(-450.04,-943.9)
  Mid-Layer 1 w8: v1(-450.04,-943.9) -405.39,-943.9 -284.18,-822.69 -160.43,-822.69 -95.67,-757.94 135.28,-757.94 v1(184.91,-807.56)
  Bottom Layer w8: v1(184.91,-807.56) 216.6,-839.25 U16.9@254.42,-839.25
pads on no net: P7. P7.0 U1.5 U1.6 U1.7 U1.8 U1.11 U1.12 U1.13 U1.14 U1.19 U1.20 U1.21 U1.22 U1.23 U1.25 U1.26 U1.34 U1.35 U1.36 U1.37 U1.38 U1.40 U1.41 U1.42 U1.43 U1.44 U1.47 U1.48 U1.49 U1.50 U1.51 U1.53 U1.66 U1.67 U1.68 U3.2 U3.9 U3.10 U3.11 U3.20 U3.26 U3.27 U3.29 U3.30 U3.33 U3.38 U3.39 U3.40 U3.41 U3.51 U3.53 U3.54 U3.56 U3.61 U5.4 U5.6 U5.7 U5.9 U5.15 U5.16 U5.17 U5.18 U10.9 U11.4 U11.5 U11.9 U13.2 U13.7 U13.11 U13.12 U14.4 U14.9 U14.10 U14.11 U15.7 U16.1 U16.4 U16.5 U16.6 U16.11 U16.12 U16.13 U16.14 Y1.3

## Polygon pours and split planes (outlines as drawn)
AGND on Top Layer "Mid-Layer 1-No Net" (solid, remove dead copper, pour order 1000): -1534.94,343.24 -1525.41,352.76 542.42,352.76 542.42,-1358.73 405.61,-1495.54 329.27,-1571.88 -1108.64,-1571.88 -1499.94,-1571.88 -1582.66,-1489.17 -1509.51,-1416.02 -1509.51,355.95
AGND on Mid-Layer 1 "Mid-Layer 1-No Net" (solid, remove dead copper, pour order 1001): -1497.23,382.48 -1487.7,392.01 580.14,392.01 580.14,-1319.49 443.32,-1456.3 366.99,-1532.64 -1070.93,-1532.64 -1462.23,-1532.64 -1544.94,-1449.92 -1471.79,-1376.77 -1471.79,395.2
AGND on Mid-Layer 2 "Mid-Layer 1-No Net" (solid, remove dead copper, pour order 1002): -1550.85,354.54 -1541.33,364.06 526.51,364.06 526.51,-1347.43 389.7,-1484.24 313.36,-1560.58 -1124.56,-1560.58 -1515.85,-1560.58 -1598.57,-1477.87 -1525.42,-1404.72 -1525.42,367.25
AGND on Bottom Layer "Mid-Layer 1-No Net" (solid, remove dead copper, pour order 1003): -1523.12,353.6 -1513.6,363.13 554.24,363.13 554.24,-1348.37 417.43,-1485.18 341.09,-1561.52 -1096.82,-1561.52 -1488.12,-1561.52 -1570.84,-1478.8 -1497.69,-1405.65 -1497.69,366.32

## Keep-outs
Keep-Out Layer:
  circle w5: c286.27,217.84 r51.18
  circle w5: c-1288.53,-1356.97 r51.18
  circle w5: c-1288.53,217.84 r51.18
  circle w5: c286.27,-1356.97 r51.18
  lines w5: -1343.65,-1412.08 341.39,-1412.08 341.39,272.95 -1343.65,272.95 -1343.65,-1412.08

## Other copper
Top Layer:
  region net VBAT_OUT: -1203.58,-112.41 -1092.89,-112.41 -1092.89,-7.84 -1203.58,-7.84
Bottom Layer:
  rectangle net AGND: -1153,-1065.98 -1133.23,-1020
  rectangle net AGND: -1094.65,-1000 -956,-965.64
  region net VBAT_OUT: -1195.4,172.71 -1134.12,233.99 -1056.51,233.99 -1044.23,221.72 -1044.23,-99.04 -1128.3,-183.12 -1128.3,-206.67 -1143.75,-222.12 -1143.75,-462.59 -1115.95,-465.58 -1115.42,-493.05 -1154.53,-495.64 -1165.31,-487.99 -1182.01,-488.1 -1181.24,-441.81 -1194.23,-423.68
  region net NetL6_1: -1198.3,-457.42 -1198.21,-457.5 -1198.21,-474.98 -1196.85,-476.35 -1188.97,-476.35 -1188.97,-441.27 -1206.12,-424.12 -1245.23,-424.12 -1260.99,-439.88 -1311.88,-439.88 -1315.33,-443.33 -1315.33,-467.27 -1311.82,-470.78 -1261.93,-470.78 -1248.38,-457.22 -1199.77,-457.22 -1199.77,-473.43 -1198.16,-475.04
  region net VCC_3V: -682.58,-745.63 -682.38,-745.63 -682.38,-678.76 -679.74,-676.12 -551.84,-676.12 -550.12,-677.84 -550.12,-713.98 -558.39,-722.24 -595.81,-722.24 -639.58,-766.02 -682.58,-766.02

## Silkscreen, mask and mechanical layers (free items; w line width, h text height)
Top Overlay:
  rectangle: -145.58,54.98 206.42,248.98
  lines w5: -1306.88,-454.47 -1291.51,-439.1 ; -1287.24,-340.71 -1287,-340.72 ; -1275.4,-455.2 -1291.51,-439.1 ; -1202.69,-560.12 -1186.58,-544.02 ; -1201.96,-528.65 -1186.58,-544.02 ; -386.28,-1408.54 -386.04,-1408.54 ; -370.67,-1423.91 -386.04,-1408.54 ; -369.94,-1392.44 -386.04,-1408.54 ; -281.12,-1408.54 -386.04,-1408.54 ; -1291.51,-439.1 -1291.51,-544.02 -1186.58,-544.02
  text "4G Tracer" at -138.58,-44.02 h100
  text "V1.0" at -22.58,-127.02 h100
  text "Y" at -1316.58,-458.02 h20
  text "X" at -1194.58,-493.02 h20 r180
  text "Y" at -423.37,-1385.35 h20 r180
Mechanical 1:
  circle w5: c-1288.53,-1356.97 r47.24
  circle w5: c286.27,217.84 r47.24
  circle w5: c-1288.53,217.84 r47.24
  circle w5: c286.27,-1356.97 r47.24
  lines w5: -1347.58,-1416.76 345.33,-1416.02 345.33,276.89 ; -1347.58,-1416.02 -1347.58,276.89 345.33,276.89 ; 337.26,268.82 345.33,276.89

## Text inside footprints (layer, text, board x,y; h text height)
BATT: Bottom Overlay "+" at -465.57,-1219.81 h40